# Altium PCB Choin1_0.PcbDoc (part 2 of 3)
Units mm, origin at the board's own origin, x right, y up, seen from the top; angles counter-clockwise.
Board outline 61 x 61 mm, 6 copper layers (Top Layer, MidLayer1, MidLayer 2, Mid-Layer 3, Mid-Layer 4, Bottom Layer), stack 1.533 mm thick; 195 components, 482 nets, 1610 pads, 432 vias.
Unrouted connection lines stored in the file: 170.
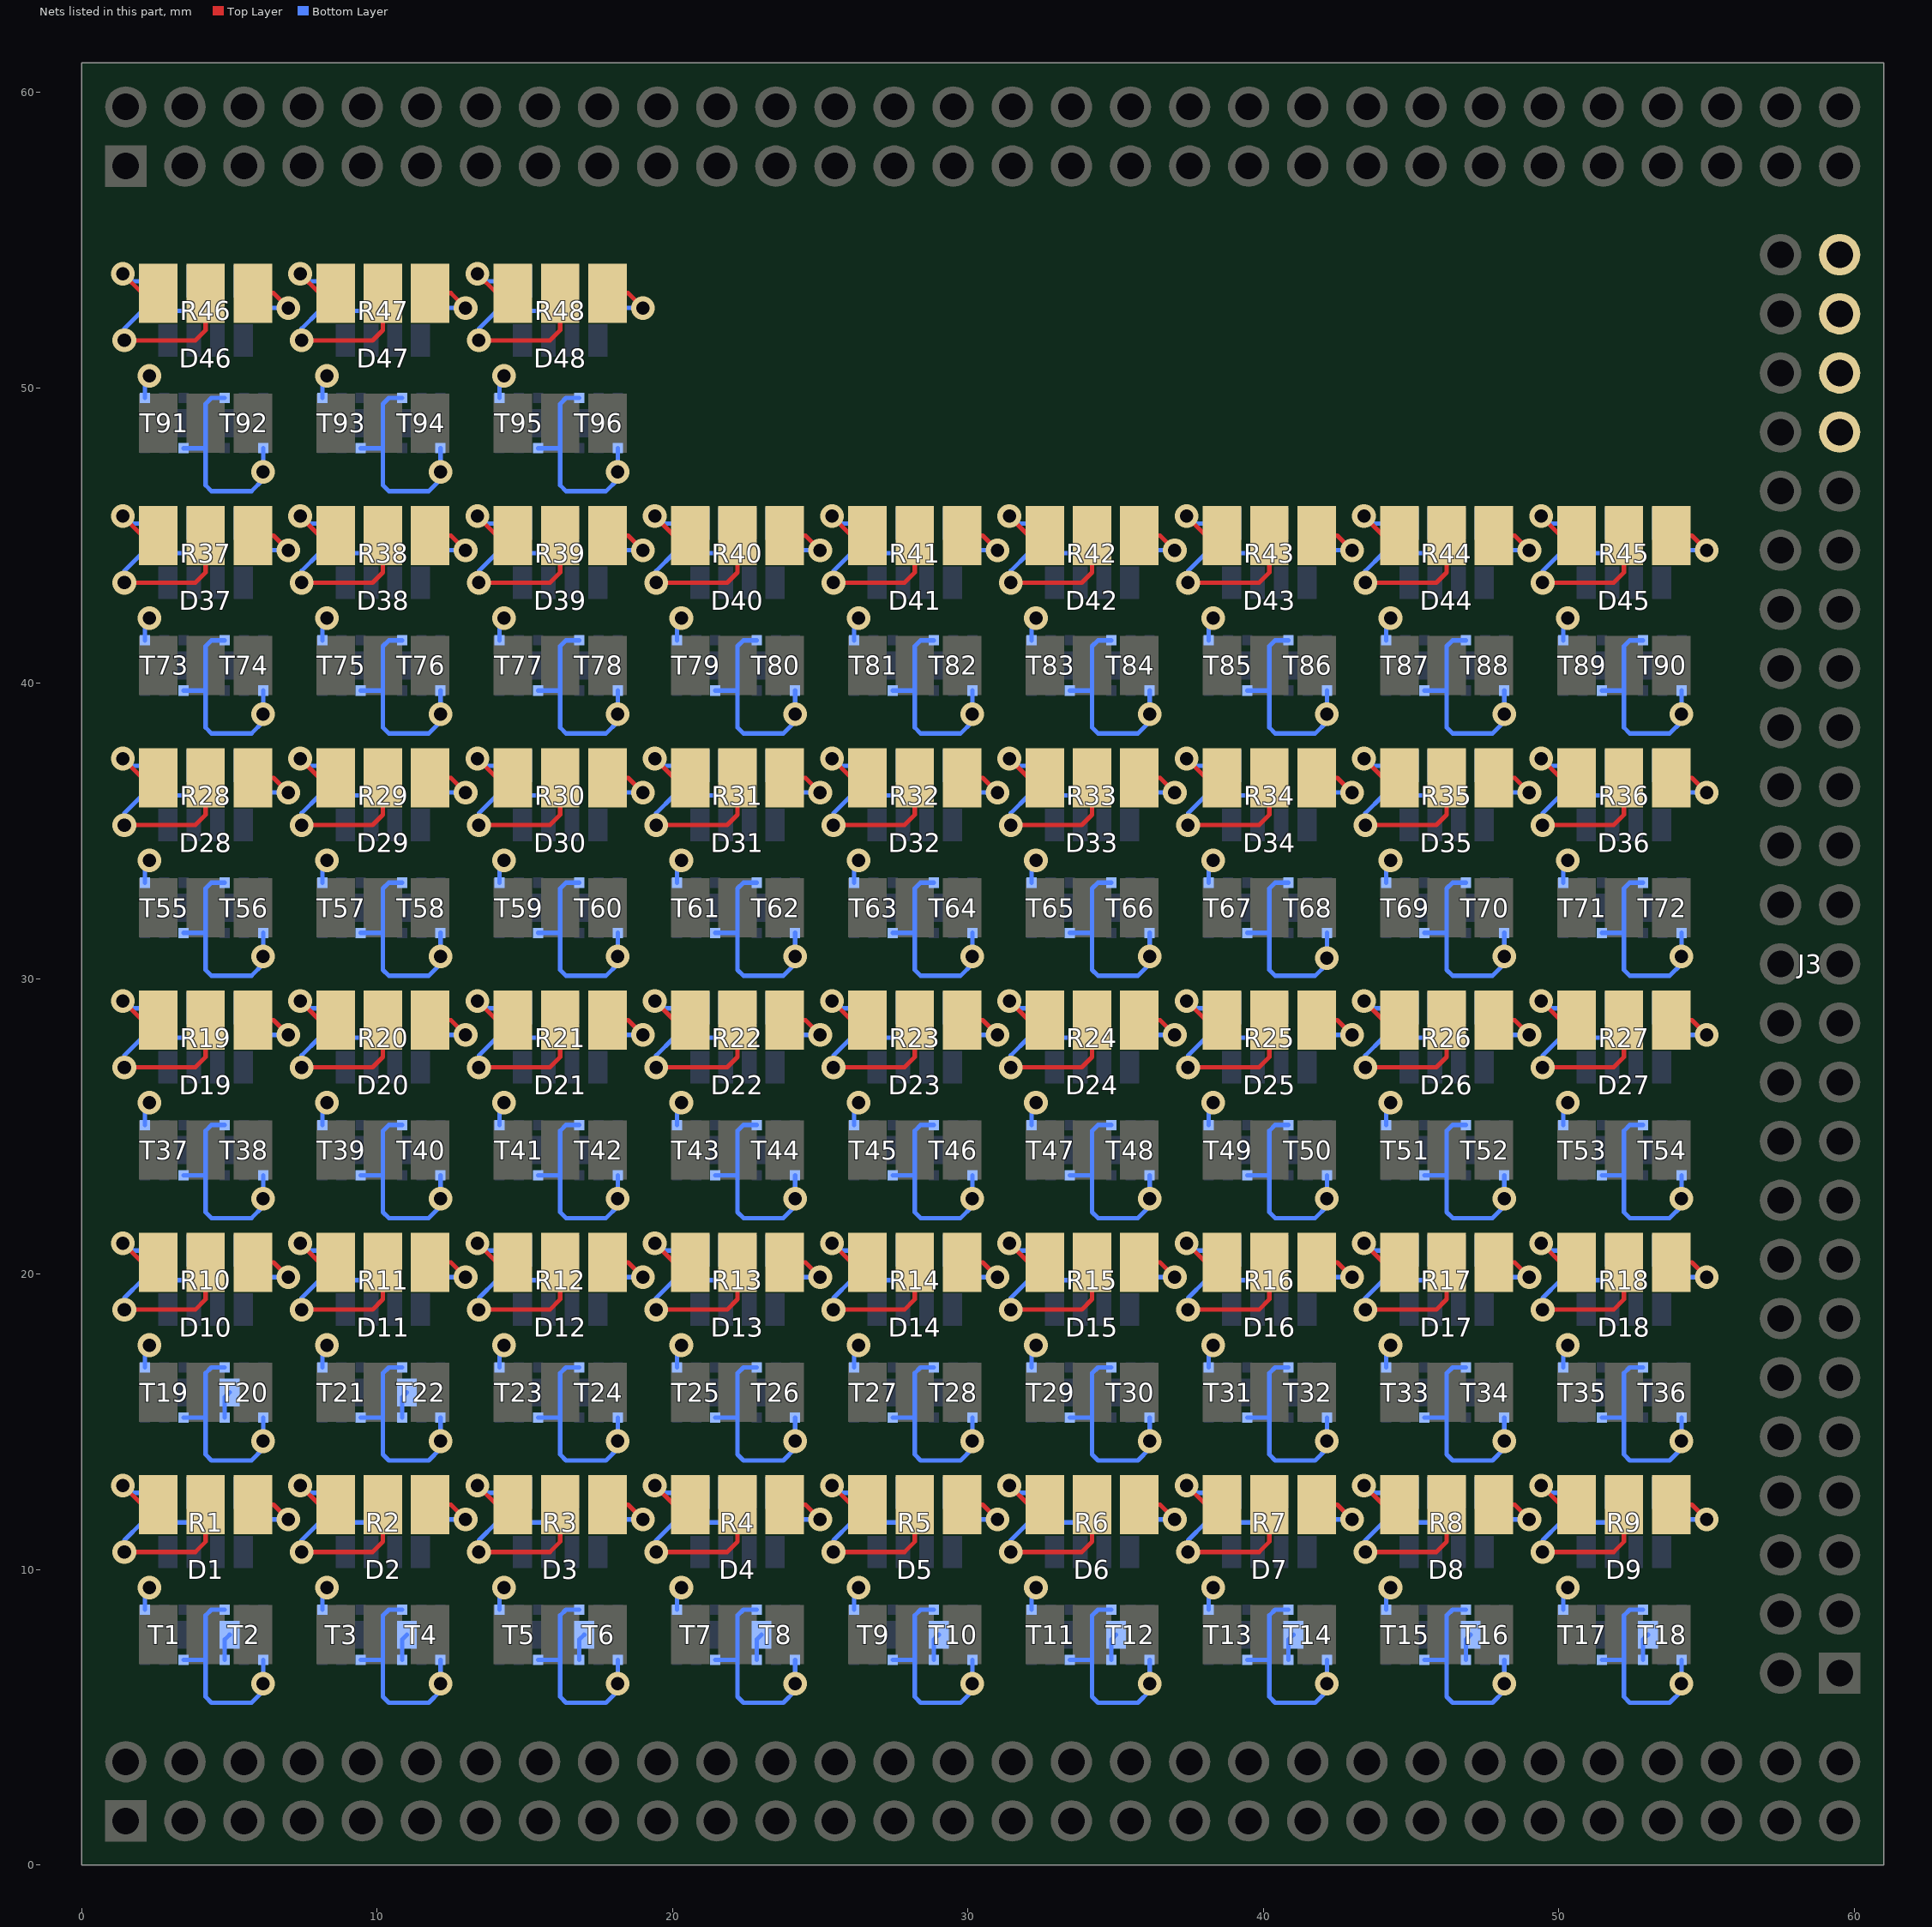
[diagram p2: the nets of this part, all layers, seen from the top]

## Via types
v1: diameter 0.8, hole 0.45, Top Layer to Bottom Layer, 432 vias

## Nets (pads, with @x,y where several pads share a name; then routed paths per layer and width w, separated by ;. In a path a pad name is that pad's centre, name@x,y a point inside that pad or via, vN(x,y) a via of type N, cw(c..) or ccw(c..) an arc to the next point about the centre after c; other vN are vias at no path point) (continued)
GND: J3.43 J3.45 J3.47 J3.49 T1.1 T1.4 T2.1 T2.4 T3.1 T3.4 T4.1 T4.4 T5.1 T5.4 T6.1 T6.4 T7.1 T7.4 T8.1 T8.4 T9.1 T9.4 T10.1 T10.4 T11.1 T11.4 T12.1 T12.4 T13.1 T13.4 T14.1 T14.4 T15.1 T15.4 T16.1 T16.4 T17.1 T17.4 T18.1 T18.4 T19.1 T19.4 T20.1 T20.4 T21.1 T21.4 T22.1 T22.4 T23.1 T23.4 T24.1 T24.4 T25.1 T25.4 T26.1 T26.4 T27.1 T27.4 T28.1 T28.4 T29.1 T29.4 T30.1 T30.4 T31.1 T31.4 T32.1 T32.4 T33.1 T33.4 T34.1 T34.4 T35.1 T35.4 T36.1 T36.4 T37.1 T37.4 T38.1 T38.4 T39.1 T39.4 T40.1 T40.4 T41.1 T41.4 T42.1 T42.4 T43.1 T43.4 T44.1 T44.4 T45.1 T45.4 T46.1 T46.4 T47.1 T47.4 T48.1 T48.4 T49.1 T49.4 T50.1 T50.4 T51.1 T51.4 T52.1 T52.4 T53.1 T53.4 T54.1 T54.4 T55.1 T55.4 T56.1 T56.4 T57.1 T57.4 T58.1 T58.4 T59.1 T59.4 T60.1 T60.4 T61.1 T61.4 T62.1 T62.4 T63.1 T63.4 T64.1 T64.4 T65.1 T65.4 T66.1 T66.4 T67.1 T67.4 T68.1 T68.4 T69.1 T69.4 T70.1 T70.4 T71.1 T71.4 T72.1 T72.4 T73.1 T73.4 T74.1 T74.4 T75.1 T75.4 T76.1 T76.4 T77.1 T77.4 T78.1 T78.4 T79.1 T79.4 T80.1 T80.4 T81.1 T81.4 T82.1 T82.4 T83.1 T83.4 T84.1 T84.4 T85.1 T85.4 T86.1 T86.4 T87.1 T87.4 T88.1 T88.4 T89.1 T89.4 T90.1 T90.4 T91.1 T91.4 T92.1 T92.4 T93.1 T93.4 T94.1 T94.4 T95.1 T95.4 T96.1 T96.4 | length 398.1
  Bottom Layer w0.15: T1.4@2.15,8.65 2.15,9.25 v1(2.3,9.4) ; T19.4@2.15,16.85 2.15,17.45 v1(2.3,17.6) ; T37.4@2.15,25.05 2.15,25.65 v1(2.3,25.8) ; T55.4@2.15,33.25 2.15,33.85 v1(2.3,34) ; T73.4@2.15,41.45 2.15,42.05 v1(2.3,42.2) ; T91.4@2.15,49.65 2.15,50.25 v1(2.3,50.4) ; T1.1@3.45,6.95 4.2,6.95 ; T19.1@3.45,15.15 4.2,15.15 ; T37.1@3.45,23.35 4.2,23.35 ; T55.1@3.45,31.55 4.2,31.55 ; T73.1@3.45,39.75 4.2,39.75 ; T91.1@3.45,47.95 4.2,47.95 ; T2.4@4.85,8.65 4.4,8.65 4.2,8.45 4.2,6.95 ; T20.4@4.85,16.85 4.4,16.85 4.2,16.65 4.2,15.15 ; T38.4@4.85,25.05 4.4,25.05 4.2,24.85 4.2,23.35 ; T56.4@4.85,33.25 4.4,33.25 4.2,33.05 4.2,31.55 ; T74.4@4.85,41.45 4.4,41.45 4.2,41.25 4.2,39.75 ; T92.4@4.85,49.65 4.4,49.65 4.2,49.45 4.2,47.95 ; T2.1@6.15,6.95 6.15,5.9 5.75,5.5 4.4,5.5 4.2,5.7 4.2,6.95 ; T20.1@6.15,15.15 6.15,14.1 5.75,13.7 4.4,13.7 4.2,13.9 4.2,15.15 ; T38.1@6.15,23.35 6.15,22.3 5.75,21.9 4.4,21.9 4.2,22.1 4.2,23.35 ; T56.1@6.15,31.55 6.15,30.5 5.75,30.1 4.4,30.1 4.2,30.3 4.2,31.55 ; T74.1@6.15,39.75 6.15,38.7 5.75,38.3 4.4,38.3 4.2,38.5 4.2,39.75 ; T92.1@6.15,47.95 6.15,46.9 5.75,46.5 4.4,46.5 4.2,46.7 4.2,47.95 ; T3.4@8.15,8.65 8.15,9.25 v1(8.3,9.4) ; T21.4@8.15,16.85 8.15,17.45 v1(8.3,17.6) ; T39.4@8.15,25.05 8.15,25.65 v1(8.3,25.8) ; T57.4@8.15,33.25 8.15,33.85 v1(8.3,34) ; T75.4@8.15,41.45 8.15,42.05 v1(8.3,42.2) ; T93.4@8.15,49.65 8.15,50.25 v1(8.3,50.4) ; T3.1@9.45,6.95 10.2,6.95 ; T21.1@9.45,15.15 10.2,15.15 ; T39.1@9.45,23.35 10.2,23.35 ; T57.1@9.45,31.55 10.2,31.55 ; T75.1@9.45,39.75 10.2,39.75 ; T93.1@9.45,47.95 10.2,47.95 ; T4.4@10.85,8.65 10.4,8.65 10.2,8.45 10.2,6.95 ; T22.4@10.85,16.85 10.4,16.85 10.2,16.65 10.2,15.15 ; T40.4@10.85,25.05 10.4,25.05 10.2,24.85 10.2,23.35 ; T58.4@10.85,33.25 10.4,33.25 10.2,33.05 10.2,31.55 ; T76.4@10.85,41.45 10.4,41.45 10.2,41.25 10.2,39.75 ; T94.4@10.85,49.65 10.4,49.65 10.2,49.45 10.2,47.95 ; T4.1@12.15,6.95 12.15,5.9 11.75,5.5 10.4,5.5 10.2,5.7 10.2,6.95 ; T22.1@12.15,15.15 12.15,14.1 11.75,13.7 10.4,13.7 10.2,13.9 10.2,15.15 ; T40.1@12.15,23.35 12.15,22.3 11.75,21.9 10.4,21.9 10.2,22.1 10.2,23.35 ; T58.1@12.15,31.55 12.15,30.5 11.75,30.1 10.4,30.1 10.2,30.3 10.2,31.55 ; T76.1@12.15,39.75 12.15,38.7 11.75,38.3 10.4,38.3 10.2,38.5 10.2,39.75 ; T94.1@12.15,47.95 12.15,46.9 11.75,46.5 10.4,46.5 10.2,46.7 10.2,47.95 ; T5.4@14.15,8.65 14.15,9.25 v1(14.3,9.4) ; T23.4@14.15,16.85 14.15,17.45 v1(14.3,17.6) ; T41.4@14.15,25.05 14.15,25.65 v1(14.3,25.8) ; T59.4@14.15,33.25 14.15,33.85 v1(14.3,34) ; T77.4@14.15,41.45 14.15,42.05 v1(14.3,42.2) ; T95.4@14.15,49.65 14.15,50.25 v1(14.3,50.4) ; T5.1@15.45,6.95 16.2,6.95 ; T23.1@15.45,15.15 16.2,15.15 ; T41.1@15.45,23.35 16.2,23.35 ; T59.1@15.45,31.55 16.2,31.55 ; T77.1@15.45,39.75 16.2,39.75 ; T95.1@15.45,47.95 16.2,47.95 ; T6.4@16.85,8.65 16.4,8.65 16.2,8.45 16.2,6.95 ; T24.4@16.85,16.85 16.4,16.85 16.2,16.65 16.2,15.15 ; T42.4@16.85,25.05 16.4,25.05 16.2,24.85 16.2,23.35 ; T60.4@16.85,33.25 16.4,33.25 16.2,33.05 16.2,31.55 ; T78.4@16.85,41.45 16.4,41.45 16.2,41.25 16.2,39.75 ; T96.4@16.85,49.65 16.4,49.65 16.2,49.45 16.2,47.95 ; T6.1@18.15,6.95 18.15,5.9 17.75,5.5 16.4,5.5 16.2,5.7 16.2,6.95 ; T24.1@18.15,15.15 18.15,14.1 17.75,13.7 16.4,13.7 16.2,13.9 16.2,15.15 ; T42.1@18.15,23.35 18.15,22.3 17.75,21.9 16.4,21.9 16.2,22.1 16.2,23.35 ; T60.1@18.15,31.55 18.15,30.5 17.75,30.1 16.4,30.1 16.2,30.3 16.2,31.55 ; T78.1@18.15,39.75 18.15,38.7 17.75,38.3 16.4,38.3 16.2,38.5 16.2,39.75 ; T96.1@18.15,47.95 18.15,46.9 17.75,46.5 16.4,46.5 16.2,46.7 16.2,47.95 ; T7.4@20.15,8.65 20.15,9.25 v1(20.3,9.4) ; T25.4@20.15,16.85 20.15,17.45 v1(20.3,17.6) ; T43.4@20.15,25.05 20.15,25.65 v1(20.3,25.8) ; T61.4@20.15,33.25 20.15,33.85 v1(20.3,34) ; T79.4@20.15,41.45 20.15,42.05 v1(20.3,42.2) ; T7.1@21.45,6.95 22.2,6.95 ; T25.1@21.45,15.15 22.2,15.15 ; T43.1@21.45,23.35 22.2,23.35 ; T61.1@21.45,31.55 22.2,31.55 ; T79.1@21.45,39.75 22.2,39.75 ; T8.4@22.85,8.65 22.4,8.65 22.2,8.45 22.2,6.95 ; T26.4@22.85,16.85 22.4,16.85 22.2,16.65 22.2,15.15 ; T44.4@22.85,25.05 22.4,25.05 22.2,24.85 22.2,23.35 ; T62.4@22.85,33.25 22.4,33.25 22.2,33.05 22.2,31.55 ; T80.4@22.85,41.45 22.4,41.45 22.2,41.25 22.2,39.75 ; T8.1@24.15,6.95 24.15,5.9 23.75,5.5 22.4,5.5 22.2,5.7 22.2,6.95 ; T26.1@24.15,15.15 24.15,14.1 23.75,13.7 22.4,13.7 22.2,13.9 22.2,15.15 ; T44.1@24.15,23.35 24.15,22.3 23.75,21.9 22.4,21.9 22.2,22.1 22.2,23.35 ; T62.1@24.15,31.55 24.15,30.5 23.75,30.1 22.4,30.1 22.2,30.3 22.2,31.55 ; T80.1@24.15,39.75 24.15,38.7 23.75,38.3 22.4,38.3 22.2,38.5 22.2,39.75 ; T9.4@26.15,8.65 26.15,9.25 v1(26.3,9.4) ; T27.4@26.15,16.85 26.15,17.45 v1(26.3,17.6) ; T45.4@26.15,25.05 26.15,25.65 v1(26.3,25.8) ; T63.4@26.15,33.25 26.15,33.85 v1(26.3,34) ; T81.4@26.15,41.45 26.15,42.05 v1(26.3,42.2) ; T9.1@27.45,6.95 28.2,6.95 ; T27.1@27.45,15.15 28.2,15.15 ; T45.1@27.45,23.35 28.2,23.35 ; T63.1@27.45,31.55 28.2,31.55 ; T81.1@27.45,39.75 28.2,39.75 ; T10.4@28.85,8.65 28.4,8.65 28.2,8.45 28.2,6.95 ; T28.4@28.85,16.85 28.4,16.85 28.2,16.65 28.2,15.15 ; T46.4@28.85,25.05 28.4,25.05 28.2,24.85 28.2,23.35 ; T64.4@28.85,33.25 28.4,33.25 28.2,33.05 28.2,31.55 ; T82.4@28.85,41.45 28.4,41.45 28.2,41.25 28.2,39.75 ; T10.1@30.15,6.95 30.15,5.9 29.75,5.5 28.4,5.5 28.2,5.7 28.2,6.95 ; T28.1@30.15,15.15 30.15,14.1 29.75,13.7 28.4,13.7 28.2,13.9 28.2,15.15 ; T46.1@30.15,23.35 30.15,22.3 29.75,21.9 28.4,21.9 28.2,22.1 28.2,23.35 ; T64.1@30.15,31.55 30.15,30.5 29.75,30.1 28.4,30.1 28.2,30.3 28.2,31.55 ; T82.1@30.15,39.75 30.15,38.7 29.75,38.3 28.4,38.3 28.2,38.5 28.2,39.75 ; T11.4@32.15,8.65 32.15,9.25 v1(32.3,9.4) ; T29.4@32.15,16.85 32.15,17.45 v1(32.3,17.6) ; T47.4@32.15,25.05 32.15,25.65 v1(32.3,25.8) ; T65.4@32.15,33.25 32.15,33.85 v1(32.3,34) ; T83.4@32.15,41.45 32.15,42.05 v1(32.3,42.2) ; T11.1@33.45,6.95 34.2,6.95 ; T29.1@33.45,15.15 34.2,15.15 ; T47.1@33.45,23.35 34.2,23.35 ; T65.1@33.45,31.55 34.2,31.55 ; T83.1@33.45,39.75 34.2,39.75 ; T12.4@34.85,8.65 34.4,8.65 34.2,8.45 34.2,6.95 ; T30.4@34.85,16.85 34.4,16.85 34.2,16.65 34.2,15.15 ; T48.4@34.85,25.05 34.4,25.05 34.2,24.85 34.2,23.35 ; T66.4@34.85,33.25 34.4,33.25 34.2,33.05 34.2,31.55 ; T84.4@34.85,41.45 34.4,41.45 34.2,41.25 34.2,39.75 ; T12.1@36.15,6.95 36.15,5.9 35.75,5.5 34.4,5.5 34.2,5.7 34.2,6.95 ; T30.1@36.15,15.15 36.15,14.1 35.75,13.7 34.4,13.7 34.2,13.9 34.2,15.15 ; T48.1@36.15,23.35 36.15,22.3 35.75,21.9 34.4,21.9 34.2,22.1 34.2,23.35 ; T66.1@36.15,31.55 36.15,30.5 35.75,30.1 34.4,30.1 34.2,30.3 34.2,31.55 ; T84.1@36.15,39.75 36.15,38.7 35.75,38.3 34.4,38.3 34.2,38.5 34.2,39.75 ; T13.4@38.15,8.65 38.15,9.25 v1(38.3,9.4) ; T31.4@38.15,16.85 38.15,17.45 v1(38.3,17.6) ; T49.4@38.15,25.05 38.15,25.65 v1(38.3,25.8) ; T67.4@38.15,33.25 38.15,33.85 v1(38.3,34) ; T85.4@38.15,41.45 38.15,42.05 v1(38.3,42.2) ; T13.1@39.45,6.95 40.2,6.95 ; T31.1@39.45,15.15 40.2,15.15 ; T49.1@39.45,23.35 40.2,23.35 ; T67.1@39.45,31.55 40.2,31.55 ; T85.1@39.45,39.75 40.2,39.75 ; T14.4@40.85,8.65 40.4,8.65 40.2,8.45 40.2,6.95 ; T32.4@40.85,16.85 40.4,16.85 40.2,16.65 40.2,15.15 ; T50.4@40.85,25.05 40.4,25.05 40.2,24.85 40.2,23.35 ; T68.4@40.85,33.25 40.4,33.25 40.2,33.05 40.2,31.55 ; T86.4@40.85,41.45 40.4,41.45 40.2,41.25 40.2,39.75 ; T14.1@42.15,6.95 42.15,5.9 41.75,5.5 40.4,5.5 40.2,5.7 40.2,6.95 ; T32.1@42.15,15.15 42.15,14.1 41.75,13.7 40.4,13.7 40.2,13.9 40.2,15.15 ; T50.1@42.15,23.35 42.15,22.3 41.75,21.9 40.4,21.9 40.2,22.1 40.2,23.35 ; T68.1@42.15,31.55 42.15,30.5 41.75,30.1 40.4,30.1 40.2,30.3 40.2,31.55 ; T86.1@42.15,39.75 42.15,38.7 41.75,38.3 40.4,38.3 40.2,38.5 40.2,39.75 ; T15.4@44.15,8.65 44.15,9.25 v1(44.3,9.4) ; T33.4@44.15,16.85 44.15,17.45 v1(44.3,17.6) ; T51.4@44.15,25.05 44.15,25.65 v1(44.3,25.8) ; T69.4@44.15,33.25 44.15,33.85 v1(44.3,34) ; T87.4@44.15,41.45 44.15,42.05 v1(44.3,42.2) ; T15.1@45.45,6.95 46.2,6.95 ; T33.1@45.45,15.15 46.2,15.15 ; T51.1@45.45,23.35 46.2,23.35 ; T69.1@45.45,31.55 46.2,31.55 ; T87.1@45.45,39.75 46.2,39.75 ; T16.4@46.85,8.65 46.4,8.65 46.2,8.45 46.2,6.95 ; T34.4@46.85,16.85 46.4,16.85 46.2,16.65 46.2,15.15 ; T52.4@46.85,25.05 46.4,25.05 46.2,24.85 46.2,23.35 ; T70.4@46.85,33.25 46.4,33.25 46.2,33.05 46.2,31.55 ; T88.4@46.85,41.45 46.4,41.45 46.2,41.25 46.2,39.75 ; T16.1@48.15,6.95 48.15,5.9 47.75,5.5 46.4,5.5 46.2,5.7 46.2,6.95 ; T34.1@48.15,15.15 48.15,14.1 47.75,13.7 46.4,13.7 46.2,13.9 46.2,15.15 ; T52.1@48.15,23.35 48.15,22.3 47.75,21.9 46.4,21.9 46.2,22.1 46.2,23.35 ; T70.1@48.15,31.55 48.15,30.5 47.75,30.1 46.4,30.1 46.2,30.3 46.2,31.55 ; T88.1@48.15,39.75 48.15,38.7 47.75,38.3 46.4,38.3 46.2,38.5 46.2,39.75 ; T17.4@50.15,8.65 50.15,9.25 v1(50.3,9.4) ; T35.4@50.15,16.85 50.15,17.45 v1(50.3,17.6) ; T53.4@50.15,25.05 50.15,25.65 v1(50.3,25.8) ; T71.4@50.15,33.25 50.15,33.85 v1(50.3,34) ; T89.4@50.15,41.45 50.15,42.05 v1(50.3,42.2) ; T17.1@51.45,6.95 52.2,6.95 ; T35.1@51.45,15.15 52.2,15.15 ; T53.1@51.45,23.35 52.2,23.35 ; T71.1@51.45,31.55 52.2,31.55 ; T89.1@51.45,39.75 52.2,39.75 ; T18.4@52.85,8.65 52.4,8.65 52.2,8.45 52.2,6.95 ; T36.4@52.85,16.85 52.4,16.85 52.2,16.65 52.2,15.15 ; T54.4@52.85,25.05 52.4,25.05 52.2,24.85 52.2,23.35 ; T72.4@52.85,33.25 52.4,33.25 52.2,33.05 52.2,31.55 ; T90.4@52.85,41.45 52.4,41.45 52.2,41.25 52.2,39.75 ; T18.1@54.15,6.95 54.15,5.9 53.75,5.5 52.4,5.5 52.2,5.7 52.2,6.95 ; T36.1@54.15,15.15 54.15,14.1 53.75,13.7 52.4,13.7 52.2,13.9 52.2,15.15 ; T54.1@54.15,23.35 54.15,22.3 53.75,21.9 52.4,21.9 52.2,22.1 52.2,23.35 ; T72.1@54.15,31.55 54.15,30.5 53.75,30.1 52.4,30.1 52.2,30.3 52.2,31.55 ; T90.1@54.15,39.75 54.15,38.7 53.75,38.3 52.4,38.3 52.2,38.5 52.2,39.75
  other v1: 6.15,6.15 12.15,6.15 18.15,6.15 24.15,6.15 30.15,6.15 36.15,6.15 42.15,6.15 48.15,6.15 54.15,6.15 6.15,14.35 12.15,14.35 18.15,14.35 24.15,14.35 30.15,14.35 36.15,14.35 42.15,14.35 48.15,14.35 54.15,14.35 6.15,22.55 12.15,22.55 18.15,22.55 24.15,22.55 30.15,22.55 36.15,22.55 42.15,22.55 48.15,22.55 54.15,22.55 42.15,30.7 6.15,30.75 12.15,30.75 18.15,30.75 24.15,30.75 30.15,30.75 36.15,30.75 48.15,30.75 54.15,30.75 6.15,38.95 12.15,38.95 18.15,38.95 24.15,38.95 30.15,38.95 36.15,38.95 42.15,38.95 48.15,38.95 54.15,38.95 6.15,47.15 12.15,47.15 18.15,47.15
LEDB0: D1.4 R1.5 | length 3.1
  Top Layer w0.15: v1(1.4,12.85) 2.05,12.2 D1.4@2.6,12.2
  Bottom Layer w0.15: v1(1.4,12.85) 1.65,12.6 R1.5@2.925,12.6
LEDB1: D2.4 R2.5 | length 3.1
  Top Layer w0.15: v1(7.4,12.85) 8.05,12.2 D2.4@8.6,12.2
  Bottom Layer w0.15: v1(7.4,12.85) 7.65,12.6 R2.5@8.925,12.6
LEDB2: D3.4 R3.5 | length 3.1
  Top Layer w0.15: v1(13.4,12.85) 14.05,12.2 D3.4@14.6,12.2
  Bottom Layer w0.15: v1(13.4,12.85) 13.65,12.6 R3.5@14.925,12.6
LEDB3: D4.4 R4.5 | length 3.1
  Top Layer w0.15: v1(19.4,12.85) 20.05,12.2 D4.4@20.6,12.2
  Bottom Layer w0.15: v1(19.4,12.85) 19.65,12.6 R4.5@20.925,12.6
LEDB4: D5.4 R5.5 | length 3.1
  Top Layer w0.15: v1(25.4,12.85) 26.05,12.2 D5.4@26.6,12.2
  Bottom Layer w0.15: v1(25.4,12.85) 25.65,12.6 R5.5@26.925,12.6
LEDB5: D6.4 R6.5 | length 3.1
  Top Layer w0.15: v1(31.4,12.85) 32.05,12.2 D6.4@32.6,12.2
  Bottom Layer w0.15: v1(31.4,12.85) 31.65,12.6 R6.5@32.925,12.6
LEDB6: D7.4 R7.5 | length 3.1
  Top Layer w0.15: v1(37.4,12.85) 38.05,12.2 D7.4@38.6,12.2
  Bottom Layer w0.15: v1(37.4,12.85) 37.65,12.6 R7.5@38.925,12.6
LEDB7: D8.4 R8.5 | length 3.1
  Top Layer w0.15: v1(43.4,12.85) 44.05,12.2 D8.4@44.6,12.2
  Bottom Layer w0.15: v1(43.4,12.85) 43.65,12.6 R8.5@44.925,12.6
LEDB8: D9.4 R9.5 | length 3.1
  Top Layer w0.15: v1(49.4,12.85) 50.05,12.2 D9.4@50.6,12.2
  Bottom Layer w0.15: v1(49.4,12.85) 49.65,12.6 R9.5@50.925,12.6
LEDB9: D10.4 R10.5 | length 3.1
  Top Layer w0.15: v1(1.4,21.05) 2.05,20.4 D10.4@2.6,20.4
  Bottom Layer w0.15: v1(1.4,21.05) 1.65,20.8 R10.5@2.925,20.8
LEDB10: D11.4 R11.5 | length 3.1
  Top Layer w0.15: v1(7.4,21.05) 8.05,20.4 D11.4@8.6,20.4
  Bottom Layer w0.15: v1(7.4,21.05) 7.65,20.8 R11.5@8.925,20.8
LEDB11: D12.4 R12.5 | length 3.1
  Top Layer w0.15: v1(13.4,21.05) 14.05,20.4 D12.4@14.6,20.4
  Bottom Layer w0.15: v1(13.4,21.05) 13.65,20.8 R12.5@14.925,20.8
LEDB12: D13.4 R13.5 | length 3.1
  Top Layer w0.15: v1(19.4,21.05) 20.05,20.4 D13.4@20.6,20.4
  Bottom Layer w0.15: v1(19.4,21.05) 19.65,20.8 R13.5@20.925,20.8
LEDB13: D14.4 R14.5 | length 3.1
  Top Layer w0.15: v1(25.4,21.05) 26.05,20.4 D14.4@26.6,20.4
  Bottom Layer w0.15: v1(25.4,21.05) 25.65,20.8 R14.5@26.925,20.8
LEDB14: D15.4 R15.5 | length 3.1
  Top Layer w0.15: v1(31.4,21.05) 32.05,20.4 D15.4@32.6,20.4
  Bottom Layer w0.15: v1(31.4,21.05) 31.65,20.8 R15.5@32.925,20.8
LEDB15: D16.4 R16.5 | length 3.1
  Top Layer w0.15: v1(37.4,21.05) 38.05,20.4 D16.4@38.6,20.4
  Bottom Layer w0.15: v1(37.4,21.05) 37.65,20.8 R16.5@38.925,20.8
LEDB16: D17.4 R17.5 | length 3.1
  Top Layer w0.15: v1(43.4,21.05) 44.05,20.4 D17.4@44.6,20.4
  Bottom Layer w0.15: v1(43.4,21.05) 43.65,20.8 R17.5@44.925,20.8
LEDB17: D18.4 R18.5 | length 3.1
  Top Layer w0.15: v1(49.4,21.05) 50.05,20.4 D18.4@50.6,20.4
  Bottom Layer w0.15: v1(49.4,21.05) 49.65,20.8 R18.5@50.925,20.8
LEDB18: D19.4 R19.5 | length 3.1
  Top Layer w0.15: v1(1.4,29.25) 2.05,28.6 D19.4@2.6,28.6
  Bottom Layer w0.15: v1(1.4,29.25) 1.65,29 R19.5@2.925,29
LEDB19: D20.4 R20.5 | length 3.1
  Top Layer w0.15: v1(7.4,29.25) 8.05,28.6 D20.4@8.6,28.6
  Bottom Layer w0.15: v1(7.4,29.25) 7.65,29 R20.5@8.925,29
LEDB20: D21.4 R21.5 | length 3.1
  Top Layer w0.15: v1(13.4,29.25) 14.05,28.6 D21.4@14.6,28.6
  Bottom Layer w0.15: v1(13.4,29.25) 13.65,29 R21.5@14.925,29
LEDB21: D22.4 R22.5 | length 3.1
  Top Layer w0.15: v1(19.4,29.25) 20.05,28.6 D22.4@20.6,28.6
  Bottom Layer w0.15: v1(19.4,29.25) 19.65,29 R22.5@20.925,29
LEDB22: D23.4 R23.5 | length 3.1
  Top Layer w0.15: v1(25.4,29.25) 26.05,28.6 D23.4@26.6,28.6
  Bottom Layer w0.15: v1(25.4,29.25) 25.65,29 R23.5@26.925,29
LEDB23: D24.4 R24.5 | length 3.1
  Top Layer w0.15: v1(31.4,29.25) 32.05,28.6 D24.4@32.6,28.6
  Bottom Layer w0.15: v1(31.4,29.25) 31.65,29 R24.5@32.925,29
LEDB24: D25.4 R25.5 | length 3.1
  Top Layer w0.15: v1(37.4,29.25) 38.05,28.6 D25.4@38.6,28.6
  Bottom Layer w0.15: v1(37.4,29.25) 37.65,29 R25.5@38.925,29
LEDB25: D26.4 R26.5 | length 3.1
  Top Layer w0.15: v1(43.4,29.25) 44.05,28.6 D26.4@44.6,28.6
  Bottom Layer w0.15: v1(43.4,29.25) 43.65,29 R26.5@44.925,29
LEDB26: D27.4 R27.5 | length 3.1
  Top Layer w0.15: v1(49.4,29.25) 50.05,28.6 D27.4@50.6,28.6
  Bottom Layer w0.15: v1(49.4,29.25) 49.65,29 R27.5@50.925,29
LEDB27: D28.4 R28.5 | length 3.1
  Top Layer w0.15: v1(1.4,37.45) 2.05,36.8 D28.4@2.6,36.8
  Bottom Layer w0.15: v1(1.4,37.45) 1.65,37.2 R28.5@2.925,37.2
LEDB28: D29.4 R29.5 | length 3.1
  Top Layer w0.15: v1(7.4,37.45) 8.05,36.8 D29.4@8.6,36.8
  Bottom Layer w0.15: v1(7.4,37.45) 7.65,37.2 R29.5@8.925,37.2
LEDB29: D30.4 R30.5 | length 3.1
  Top Layer w0.15: v1(13.4,37.45) 14.05,36.8 D30.4@14.6,36.8
  Bottom Layer w0.15: v1(13.4,37.45) 13.65,37.2 R30.5@14.925,37.2
LEDB30: D31.4 R31.5 | length 3.1
  Top Layer w0.15: v1(19.4,37.45) 20.05,36.8 D31.4@20.6,36.8
  Bottom Layer w0.15: v1(19.4,37.45) 19.65,37.2 R31.5@20.925,37.2
LEDB31: D32.4 R32.5 | length 3.1
  Top Layer w0.15: v1(25.4,37.45) 26.05,36.8 D32.4@26.6,36.8
  Bottom Layer w0.15: v1(25.4,37.45) 25.65,37.2 R32.5@26.925,37.2
LEDB32: D33.4 R33.5 | length 3.1
  Top Layer w0.15: v1(31.4,37.45) 32.05,36.8 D33.4@32.6,36.8
  Bottom Layer w0.15: v1(31.4,37.45) 31.65,37.2 R33.5@32.925,37.2
LEDB33: D34.4 R34.5 | length 3.1
  Top Layer w0.15: v1(37.4,37.45) 38.05,36.8 D34.4@38.6,36.8
  Bottom Layer w0.15: v1(37.4,37.45) 37.65,37.2 R34.5@38.925,37.2
LEDB34: D35.4 R35.5 | length 3.1
  Top Layer w0.15: v1(43.4,37.45) 44.05,36.8 D35.4@44.6,36.8
  Bottom Layer w0.15: v1(43.4,37.45) 43.65,37.2 R35.5@44.925,37.2
LEDB35: D36.4 R36.5 | length 3.1
  Top Layer w0.15: v1(49.4,37.45) 50.05,36.8 D36.4@50.6,36.8
  Bottom Layer w0.15: v1(49.4,37.45) 49.65,37.2 R36.5@50.925,37.2
LEDB36: D37.4 R37.5 | length 3.1
  Top Layer w0.15: v1(1.4,45.65) 2.05,45 D37.4@2.6,45
  Bottom Layer w0.15: v1(1.4,45.65) 1.65,45.4 R37.5@2.925,45.4
LEDB37: D38.4 R38.5 | length 3.1
  Top Layer w0.15: v1(7.4,45.65) 8.05,45 D38.4@8.6,45
  Bottom Layer w0.15: v1(7.4,45.65) 7.65,45.4 R38.5@8.925,45.4
LEDB38: D39.4 R39.5 | length 3.1
  Top Layer w0.15: v1(13.4,45.65) 14.05,45 D39.4@14.6,45
  Bottom Layer w0.15: v1(13.4,45.65) 13.65,45.4 R39.5@14.925,45.4
LEDB39: D40.4 R40.5 | length 3.1
  Top Layer w0.15: v1(19.4,45.65) 20.05,45 D40.4@20.6,45
  Bottom Layer w0.15: v1(19.4,45.65) 19.65,45.4 R40.5@20.925,45.4
LEDB40: D41.4 R41.5 | length 3.1
  Top Layer w0.15: v1(25.4,45.65) 26.05,45 D41.4@26.6,45
  Bottom Layer w0.15: v1(25.4,45.65) 25.65,45.4 R41.5@26.925,45.4
LEDB41: D42.4 R42.5 | length 3.1
  Top Layer w0.15: v1(31.4,45.65) 32.05,45 D42.4@32.6,45
  Bottom Layer w0.15: v1(31.4,45.65) 31.65,45.4 R42.5@32.925,45.4
LEDB42: D43.4 R43.5 | length 3.1
  Top Layer w0.15: v1(37.4,45.65) 38.05,45 D43.4@38.6,45
  Bottom Layer w0.15: v1(37.4,45.65) 37.65,45.4 R43.5@38.925,45.4
LEDB43: D44.4 R44.5 | length 3.1
  Top Layer w0.15: v1(43.4,45.65) 44.05,45 D44.4@44.6,45
  Bottom Layer w0.15: v1(43.4,45.65) 43.65,45.4 R44.5@44.925,45.4
LEDB44: D45.4 R45.5 | length 3.1
  Top Layer w0.15: v1(49.4,45.65) 50.05,45 D45.4@50.6,45
  Bottom Layer w0.15: v1(49.4,45.65) 49.65,45.4 R45.5@50.925,45.4
LEDB45: D46.4 R46.5 | length 3.1
  Top Layer w0.15: v1(1.4,53.85) 2.05,53.2 D46.4@2.6,53.2
  Bottom Layer w0.15: v1(1.4,53.85) 1.65,53.6 R46.5@2.925,53.6
LEDB46: D47.4 R47.5 | length 3.1
  Top Layer w0.15: v1(7.4,53.85) 8.05,53.2 D47.4@8.6,53.2
  Bottom Layer w0.15: v1(7.4,53.85) 7.65,53.6 R47.5@8.925,53.6
LEDB47: D48.4 R48.5 | length 3.1
  Top Layer w0.15: v1(13.4,53.85) 14.05,53.2 D48.4@14.6,53.2
  Bottom Layer w0.15: v1(13.4,53.85) 13.65,53.6 R48.5@14.925,53.6
LEDG0: D1.6 R1.8 | length 3.3
  Top Layer w0.15: D1.6@5.8,12.2 6.5,12.2 v1(7,11.7)
  Bottom Layer w0.15: R1.8@5.475,12.6 6.375,11.7 v1(7,11.7)
LEDG1: D2.6 R2.8 | length 3.3
  Top Layer w0.15: D2.6@11.8,12.2 12.5,12.2 v1(13,11.7)
  Bottom Layer w0.15: R2.8@11.475,12.6 12.375,11.7 v1(13,11.7)
LEDG2: D3.6 R3.8 | length 3.3
  Top Layer w0.15: D3.6@17.8,12.2 18.5,12.2 v1(19,11.7)
  Bottom Layer w0.15: R3.8@17.475,12.6 18.375,11.7 v1(19,11.7)
LEDG3: D4.6 R4.8 | length 3.3
  Top Layer w0.15: D4.6@23.8,12.2 24.5,12.2 v1(25,11.7)
  Bottom Layer w0.15: R4.8@23.475,12.6 24.375,11.7 v1(25,11.7)
LEDG4: D5.6 R5.8 | length 3.3
  Top Layer w0.15: D5.6@29.8,12.2 30.5,12.2 v1(31,11.7)
  Bottom Layer w0.15: R5.8@29.475,12.6 30.375,11.7 v1(31,11.7)
LEDG5: D6.6 R6.8 | length 3.3
  Top Layer w0.15: D6.6@35.8,12.2 36.5,12.2 v1(37,11.7)
  Bottom Layer w0.15: R6.8@35.475,12.6 36.375,11.7 v1(37,11.7)
LEDG6: D7.6 R7.8 | length 3.3
  Top Layer w0.15: D7.6@41.8,12.2 42.5,12.2 v1(43,11.7)
  Bottom Layer w0.15: R7.8@41.475,12.6 42.375,11.7 v1(43,11.7)
LEDG7: D8.6 R8.8 | length 3.3
  Top Layer w0.15: D8.6@47.8,12.2 48.5,12.2 v1(49,11.7)
  Bottom Layer w0.15: R8.8@47.475,12.6 48.375,11.7 v1(49,11.7)
LEDG8: D9.6 R9.8 | length 3.3
  Top Layer w0.15: D9.6@53.8,12.2 54.5,12.2 v1(55,11.7)
  Bottom Layer w0.15: R9.8@53.475,12.6 54.375,11.7 v1(55,11.7)
LEDG9: D10.6 R10.8 | length 3.3
  Top Layer w0.15: D10.6@5.8,20.4 6.5,20.4 v1(7,19.9)
  Bottom Layer w0.15: R10.8@5.475,20.8 6.375,19.9 v1(7,19.9)
LEDG10: D11.6 R11.8 | length 3.3
  Top Layer w0.15: D11.6@11.8,20.4 12.5,20.4 v1(13,19.9)
  Bottom Layer w0.15: R11.8@11.475,20.8 12.375,19.9 v1(13,19.9)
LEDG11: D12.6 R12.8 | length 3.3
  Top Layer w0.15: D12.6@17.8,20.4 18.5,20.4 v1(19,19.9)
  Bottom Layer w0.15: R12.8@17.475,20.8 18.375,19.9 v1(19,19.9)
LEDG12: D13.6 R13.8 | length 3.3
  Top Layer w0.15: D13.6@23.8,20.4 24.5,20.4 v1(25,19.9)
  Bottom Layer w0.15: R13.8@23.475,20.8 24.375,19.9 v1(25,19.9)
LEDG13: D14.6 R14.8 | length 3.3
  Top Layer w0.15: D14.6@29.8,20.4 30.5,20.4 v1(31,19.9)
  Bottom Layer w0.15: R14.8@29.475,20.8 30.375,19.9 v1(31,19.9)
LEDG14: D15.6 R15.8 | length 3.3
  Top Layer w0.15: D15.6@35.8,20.4 36.5,20.4 v1(37,19.9)
  Bottom Layer w0.15: R15.8@35.475,20.8 36.375,19.9 v1(37,19.9)
LEDG15: D16.6 R16.8 | length 3.3
  Top Layer w0.15: D16.6@41.8,20.4 42.5,20.4 v1(43,19.9)
  Bottom Layer w0.15: R16.8@41.475,20.8 42.375,19.9 v1(43,19.9)
LEDG16: D17.6 R17.8 | length 3.3
  Top Layer w0.15: D17.6@47.8,20.4 48.5,20.4 v1(49,19.9)
  Bottom Layer w0.15: R17.8@47.475,20.8 48.375,19.9 v1(49,19.9)
LEDG17: D18.6 R18.8 | length 3.3
  Top Layer w0.15: D18.6@53.8,20.4 54.5,20.4 v1(55,19.9)
  Bottom Layer w0.15: R18.8@53.475,20.8 54.375,19.9 v1(55,19.9)
LEDG18: D19.6 R19.8 | length 3.3
  Top Layer w0.15: D19.6@5.8,28.6 6.5,28.6 v1(7,28.1)
  Bottom Layer w0.15: R19.8@5.475,29 6.375,28.1 v1(7,28.1)
LEDG19: D20.6 R20.8 | length 3.3
  Top Layer w0.15: D20.6@11.8,28.6 12.5,28.6 v1(13,28.1)
  Bottom Layer w0.15: R20.8@11.475,29 12.375,28.1 v1(13,28.1)
LEDG20: D21.6 R21.8 | length 3.3
  Top Layer w0.15: D21.6@17.8,28.6 18.5,28.6 v1(19,28.1)
  Bottom Layer w0.15: R21.8@17.475,29 18.375,28.1 v1(19,28.1)
LEDG21: D22.6 R22.8 | length 3.3
  Top Layer w0.15: D22.6@23.8,28.6 24.5,28.6 v1(25,28.1)
  Bottom Layer w0.15: R22.8@23.475,29 24.375,28.1 v1(25,28.1)
LEDG22: D23.6 R23.8 | length 3.3
  Top Layer w0.15: D23.6@29.8,28.6 30.5,28.6 v1(31,28.1)
  Bottom Layer w0.15: R23.8@29.475,29 30.375,28.1 v1(31,28.1)
LEDG23: D24.6 R24.8 | length 3.3
  Top Layer w0.15: D24.6@35.8,28.6 36.5,28.6 v1(37,28.1)
  Bottom Layer w0.15: R24.8@35.475,29 36.375,28.1 v1(37,28.1)
LEDG24: D25.6 R25.8 | length 3.3
  Top Layer w0.15: D25.6@41.8,28.6 42.5,28.6 v1(43,28.1)
  Bottom Layer w0.15: R25.8@41.475,29 42.375,28.1 v1(43,28.1)
LEDG25: D26.6 R26.8 | length 3.3
  Top Layer w0.15: D26.6@47.8,28.6 48.5,28.6 v1(49,28.1)
  Bottom Layer w0.15: R26.8@47.475,29 48.375,28.1 v1(49,28.1)
LEDG26: D27.6 R27.8 | length 3.3
  Top Layer w0.15: D27.6@53.8,28.6 54.5,28.6 v1(55,28.1)
  Bottom Layer w0.15: R27.8@53.475,29 54.375,28.1 v1(55,28.1)
LEDG27: D28.6 R28.8 | length 3.3
  Top Layer w0.15: D28.6@5.8,36.8 6.5,36.8 v1(7,36.3)
  Bottom Layer w0.15: R28.8@5.475,37.2 6.375,36.3 v1(7,36.3)
LEDG28: D29.6 R29.8 | length 3.3
  Top Layer w0.15: D29.6@11.8,36.8 12.5,36.8 v1(13,36.3)
  Bottom Layer w0.15: R29.8@11.475,37.2 12.375,36.3 v1(13,36.3)
LEDG29: D30.6 R30.8 | length 3.3
  Top Layer w0.15: D30.6@17.8,36.8 18.5,36.8 v1(19,36.3)
  Bottom Layer w0.15: R30.8@17.475,37.2 18.375,36.3 v1(19,36.3)
LEDG30: D31.6 R31.8 | length 3.3
  Top Layer w0.15: D31.6@23.8,36.8 24.5,36.8 v1(25,36.3)
  Bottom Layer w0.15: R31.8@23.475,37.2 24.375,36.3 v1(25,36.3)
LEDG31: D32.6 R32.8 | length 3.3
  Top Layer w0.15: D32.6@29.8,36.8 30.5,36.8 v1(31,36.3)
  Bottom Layer w0.15: R32.8@29.475,37.2 30.375,36.3 v1(31,36.3)
LEDG32: D33.6 R33.8 | length 3.3
  Top Layer w0.15: D33.6@35.8,36.8 36.5,36.8 v1(37,36.3)
  Bottom Layer w0.15: R33.8@35.475,37.2 36.375,36.3 v1(37,36.3)
LEDG33: D34.6 R34.8 | length 3.3
  Top Layer w0.15: D34.6@41.8,36.8 42.5,36.8 v1(43,36.3)
  Bottom Layer w0.15: R34.8@41.475,37.2 42.375,36.3 v1(43,36.3)
LEDG34: D35.6 R35.8 | length 3.3
  Top Layer w0.15: D35.6@47.8,36.8 48.5,36.8 v1(49,36.3)
  Bottom Layer w0.15: R35.8@47.475,37.2 48.375,36.3 v1(49,36.3)
LEDG35: D36.6 R36.8 | length 3.3
  Top Layer w0.15: D36.6@53.8,36.8 54.5,36.8 v1(55,36.3)
  Bottom Layer w0.15: R36.8@53.475,37.2 54.375,36.3 v1(55,36.3)
LEDG36: D37.6 R37.8 | length 3.3
  Top Layer w0.15: D37.6@5.8,45 6.5,45 v1(7,44.5)
  Bottom Layer w0.15: R37.8@5.475,45.4 6.375,44.5 v1(7,44.5)
LEDG37: D38.6 R38.8 | length 3.3
  Top Layer w0.15: D38.6@11.8,45 12.5,45 v1(13,44.5)
  Bottom Layer w0.15: R38.8@11.475,45.4 12.375,44.5 v1(13,44.5)
LEDG38: D39.6 R39.8 | length 3.3
  Top Layer w0.15: D39.6@17.8,45 18.5,45 v1(19,44.5)
  Bottom Layer w0.15: R39.8@17.475,45.4 18.375,44.5 v1(19,44.5)
LEDG39: D40.6 R40.8 | length 3.3
  Top Layer w0.15: D40.6@23.8,45 24.5,45 v1(25,44.5)
  Bottom Layer w0.15: R40.8@23.475,45.4 24.375,44.5 v1(25,44.5)
LEDG40: D41.6 R41.8 | length 3.3
  Top Layer w0.15: D41.6@29.8,45 30.5,45 v1(31,44.5)
  Bottom Layer w0.15: R41.8@29.475,45.4 30.375,44.5 v1(31,44.5)
LEDG41: D42.6 R42.8 | length 3.3
  Top Layer w0.15: D42.6@35.8,45 36.5,45 v1(37,44.5)
  Bottom Layer w0.15: R42.8@35.475,45.4 36.375,44.5 v1(37,44.5)
LEDG42: D43.6 R43.8 | length 3.3
  Top Layer w0.15: D43.6@41.8,45 42.5,45 v1(43,44.5)
  Bottom Layer w0.15: R43.8@41.475,45.4 42.375,44.5 v1(43,44.5)
LEDG43: D44.6 R44.8 | length 3.3
  Top Layer w0.15: D44.6@47.8,45 48.5,45 v1(49,44.5)
  Bottom Layer w0.15: R44.8@47.475,45.4 48.375,44.5 v1(49,44.5)
LEDG44: D45.6 R45.8 | length 3.3
  Top Layer w0.15: D45.6@53.8,45 54.5,45 v1(55,44.5)
  Bottom Layer w0.15: R45.8@53.475,45.4 54.375,44.5 v1(55,44.5)
LEDG45: D46.6 R46.8 | length 3.3
  Top Layer w0.15: D46.6@5.8,53.2 6.5,53.2 v1(7,52.7)
  Bottom Layer w0.15: R46.8@5.475,53.6 6.375,52.7 v1(7,52.7)
LEDG46: D47.6 R47.8 | length 3.3
  Top Layer w0.15: D47.6@11.8,53.2 12.5,53.2 v1(13,52.7)
  Bottom Layer w0.15: R47.8@11.475,53.6 12.375,52.7 v1(13,52.7)
LEDG47: D48.6 R48.8 | length 3.3
  Top Layer w0.15: D48.6@17.8,53.2 18.5,53.2 v1(19,52.7)
  Bottom Layer w0.15: R48.8@17.475,53.6 18.375,52.7 v1(19,52.7)
LEDR0: D1.5 R1.6 | length 8.1
  Top Layer w0.15: v1(1.45,10.6) 3.85,10.6 4.2,10.95 D1.5@4.2,12.2
  Bottom Layer w0.15: v1(1.45,10.6) 1.45,11 2.05,11.6 3.65,11.6 3.8,11.75 R1.6@3.8,12.6
LEDR1: D2.5 R2.6 | length 8.1
  Top Layer w0.15: v1(7.45,10.6) 9.85,10.6 10.2,10.95 D2.5@10.2,12.2
  Bottom Layer w0.15: v1(7.45,10.6) 7.45,11 8.05,11.6 9.65,11.6 9.8,11.75 R2.6@9.8,12.6
LEDR2: D3.5 R3.6 | length 8.1
  Top Layer w0.15: v1(13.45,10.6) 15.85,10.6 16.2,10.95 D3.5@16.2,12.2
  Bottom Layer w0.15: v1(13.45,10.6) 13.45,11 14.05,11.6 15.65,11.6 15.8,11.75 R3.6@15.8,12.6
LEDR3: D4.5 R4.6 | length 8.1
  Top Layer w0.15: v1(19.45,10.6) 21.85,10.6 22.2,10.95 D4.5@22.2,12.2
  Bottom Layer w0.15: v1(19.45,10.6) 19.45,11 20.05,11.6 21.65,11.6 21.8,11.75 R4.6@21.8,12.6
LEDR4: D5.5 R5.6 | length 8.1
  Top Layer w0.15: v1(25.45,10.6) 27.85,10.6 28.2,10.95 D5.5@28.2,12.2
  Bottom Layer w0.15: v1(25.45,10.6) 25.45,11 26.05,11.6 27.65,11.6 27.8,11.75 R5.6@27.8,12.6
LEDR5: D6.5 R6.6 | length 8.1
  Top Layer w0.15: v1(31.45,10.6) 33.85,10.6 34.2,10.95 D6.5@34.2,12.2
  Bottom Layer w0.15: v1(31.45,10.6) 31.45,11 32.05,11.6 33.65,11.6 33.8,11.75 R6.6@33.8,12.6
LEDR6: D7.5 R7.6 | length 8.1
  Top Layer w0.15: v1(37.45,10.6) 39.85,10.6 40.2,10.95 D7.5@40.2,12.2
  Bottom Layer w0.15: v1(37.45,10.6) 37.45,11 38.05,11.6 39.65,11.6 39.8,11.75 R7.6@39.8,12.6
LEDR7: D8.5 R8.6 | length 8.1
  Top Layer w0.15: v1(43.45,10.6) 45.85,10.6 46.2,10.95 D8.5@46.2,12.2
  Bottom Layer w0.15: v1(43.45,10.6) 43.45,11 44.05,11.6 45.65,11.6 45.8,11.75 R8.6@45.8,12.6
LEDR8: D9.5 R9.6 | length 8.1
  Top Layer w0.15: v1(49.45,10.6) 51.85,10.6 52.2,10.95 D9.5@52.2,12.2
  Bottom Layer w0.15: v1(49.45,10.6) 49.45,11 50.05,11.6 51.65,11.6 51.8,11.75 R9.6@51.8,12.6
LEDR9: D10.5 R10.6 | length 8.1
  Top Layer w0.15: v1(1.45,18.8) 3.85,18.8 4.2,19.15 D10.5@4.2,20.4
  Bottom Layer w0.15: v1(1.45,18.8) 1.45,19.2 2.05,19.8 3.65,19.8 3.8,19.95 R10.6@3.8,20.8
LEDR10: D11.5 R11.6 | length 8.1
  Top Layer w0.15: v1(7.45,18.8) 9.85,18.8 10.2,19.15 D11.5@10.2,20.4
  Bottom Layer w0.15: v1(7.45,18.8) 7.45,19.2 8.05,19.8 9.65,19.8 9.8,19.95 R11.6@9.8,20.8
LEDR11: D12.5 R12.6 | length 8.1
  Top Layer w0.15: v1(13.45,18.8) 15.85,18.8 16.2,19.15 D12.5@16.2,20.4
  Bottom Layer w0.15: v1(13.45,18.8) 13.45,19.2 14.05,19.8 15.65,19.8 15.8,19.95 R12.6@15.8,20.8
LEDR12: D13.5 R13.6 | length 8.1
  Top Layer w0.15: v1(19.45,18.8) 21.85,18.8 22.2,19.15 D13.5@22.2,20.4
  Bottom Layer w0.15: v1(19.45,18.8) 19.45,19.2 20.05,19.8 21.65,19.8 21.8,19.95 R13.6@21.8,20.8
LEDR13: D14.5 R14.6 | length 8.1
  Top Layer w0.15: v1(25.45,18.8) 27.85,18.8 28.2,19.15 D14.5@28.2,20.4
  Bottom Layer w0.15: v1(25.45,18.8) 25.45,19.2 26.05,19.8 27.65,19.8 27.8,19.95 R14.6@27.8,20.8
LEDR14: D15.5 R15.6 | length 8.1
  Top Layer w0.15: v1(31.45,18.8) 33.85,18.8 34.2,19.15 D15.5@34.2,20.4
  Bottom Layer w0.15: v1(31.45,18.8) 31.45,19.2 32.05,19.8 33.65,19.8 33.8,19.95 R15.6@33.8,20.8
LEDR15: D16.5 R16.6 | length 8.1
  Top Layer w0.15: v1(37.45,18.8) 39.85,18.8 40.2,19.15 D16.5@40.2,20.4
  Bottom Layer w0.15: v1(37.45,18.8) 37.45,19.2 38.05,19.8 39.65,19.8 39.8,19.95 R16.6@39.8,20.8
LEDR16: D17.5 R17.6 | length 8.1
  Top Layer w0.15: v1(43.45,18.8) 45.85,18.8 46.2,19.15 D17.5@46.2,20.4
  Bottom Layer w0.15: v1(43.45,18.8) 43.45,19.2 44.05,19.8 45.65,19.8 45.8,19.95 R17.6@45.8,20.8
LEDR17: D18.5 R18.6 | length 8.1
  Top Layer w0.15: v1(49.45,18.8) 51.85,18.8 52.2,19.15 D18.5@52.2,20.4
  Bottom Layer w0.15: v1(49.45,18.8) 49.45,19.2 50.05,19.8 51.65,19.8 51.8,19.95 R18.6@51.8,20.8
LEDR18: D19.5 R19.6 | length 8.1
  Top Layer w0.15: v1(1.45,27) 3.85,27 4.2,27.35 D19.5@4.2,28.6
  Bottom Layer w0.15: v1(1.45,27) 1.45,27.4 2.05,28 3.65,28 3.8,28.15 R19.6@3.8,29
LEDR19: D20.5 R20.6 | length 8.1
  Top Layer w0.15: v1(7.45,27) 9.85,27 10.2,27.35 D20.5@10.2,28.6
  Bottom Layer w0.15: v1(7.45,27) 7.45,27.4 8.05,28 9.65,28 9.8,28.15 R20.6@9.8,29
LEDR20: D21.5 R21.6 | length 8.1
  Top Layer w0.15: v1(13.45,27) 15.85,27 16.2,27.35 D21.5@16.2,28.6
  Bottom Layer w0.15: v1(13.45,27) 13.45,27.4 14.05,28 15.65,28 15.8,28.15 R21.6@15.8,29
LEDR21: D22.5 R22.6 | length 8.1
  Top Layer w0.15: v1(19.45,27) 21.85,27 22.2,27.35 D22.5@22.2,28.6
  Bottom Layer w0.15: v1(19.45,27) 19.45,27.4 20.05,28 21.65,28 21.8,28.15 R22.6@21.8,29
LEDR22: D23.5 R23.6 | length 8.1
  Top Layer w0.15: v1(25.45,27) 27.85,27 28.2,27.35 D23.5@28.2,28.6
  Bottom Layer w0.15: v1(25.45,27) 25.45,27.4 26.05,28 27.65,28 27.8,28.15 R23.6@27.8,29
LEDR23: D24.5 R24.6 | length 8.1
  Top Layer w0.15: v1(31.45,27) 33.85,27 34.2,27.35 D24.5@34.2,28.6
  Bottom Layer w0.15: v1(31.45,27) 31.45,27.4 32.05,28 33.65,28 33.8,28.15 R24.6@33.8,29
LEDR24: D25.5 R25.6 | length 8.1
  Top Layer w0.15: v1(37.45,27) 39.85,27 40.2,27.35 D25.5@40.2,28.6
  Bottom Layer w0.15: v1(37.45,27) 37.45,27.4 38.05,28 39.65,28 39.8,28.15 R25.6@39.8,29
LEDR25: D26.5 R26.6 | length 8.1
  Top Layer w0.15: v1(43.45,27) 45.85,27 46.2,27.35 D26.5@46.2,28.6
  Bottom Layer w0.15: v1(43.45,27) 43.45,27.4 44.05,28 45.65,28 45.8,28.15 R26.6@45.8,29
LEDR26: D27.5 R27.6 | length 8.1
  Top Layer w0.15: v1(49.45,27) 51.85,27 52.2,27.35 D27.5@52.2,28.6
  Bottom Layer w0.15: v1(49.45,27) 49.45,27.4 50.05,28 51.65,28 51.8,28.15 R27.6@51.8,29
LEDR27: D28.5 R28.6 | length 8.1
  Top Layer w0.15: v1(1.45,35.2) 3.85,35.2 4.2,35.55 D28.5@4.2,36.8
  Bottom Layer w0.15: v1(1.45,35.2) 1.45,35.6 2.05,36.2 3.65,36.2 3.8,36.35 R28.6@3.8,37.2
LEDR28: D29.5 R29.6 | length 8.1
  Top Layer w0.15: v1(7.45,35.2) 9.85,35.2 10.2,35.55 D29.5@10.2,36.8
  Bottom Layer w0.15: v1(7.45,35.2) 7.45,35.6 8.05,36.2 9.65,36.2 9.8,36.35 R29.6@9.8,37.2
LEDR29: D30.5 R30.6 | length 8.1
  Top Layer w0.15: v1(13.45,35.2) 15.85,35.2 16.2,35.55 D30.5@16.2,36.8
  Bottom Layer w0.15: v1(13.45,35.2) 13.45,35.6 14.05,36.2 15.65,36.2 15.8,36.35 R30.6@15.8,37.2
LEDR30: D31.5 R31.6 | length 8.1
  Top Layer w0.15: v1(19.45,35.2) 21.85,35.2 22.2,35.55 D31.5@22.2,36.8
  Bottom Layer w0.15: v1(19.45,35.2) 19.45,35.6 20.05,36.2 21.65,36.2 21.8,36.35 R31.6@21.8,37.2
LEDR31: D32.5 R32.6 | length 8.1
  Top Layer w0.15: v1(25.45,35.2) 27.85,35.2 28.2,35.55 D32.5@28.2,36.8
  Bottom Layer w0.15: v1(25.45,35.2) 25.45,35.6 26.05,36.2 27.65,36.2 27.8,36.35 R32.6@27.8,37.2
LEDR32: D33.5 R33.6 | length 8.1
  Top Layer w0.15: v1(31.45,35.2) 33.85,35.2 34.2,35.55 D33.5@34.2,36.8
  Bottom Layer w0.15: v1(31.45,35.2) 31.45,35.6 32.05,36.2 33.65,36.2 33.8,36.35 R33.6@33.8,37.2
LEDR33: D34.5 R34.6 | length 8.1
  Top Layer w0.15: v1(37.45,35.2) 39.85,35.2 40.2,35.55 D34.5@40.2,36.8
  Bottom Layer w0.15: v1(37.45,35.2) 37.45,35.6 38.05,36.2 39.65,36.2 39.8,36.35 R34.6@39.8,37.2
LEDR34: D35.5 R35.6 | length 8.1
  Top Layer w0.15: v1(43.45,35.2) 45.85,35.2 46.2,35.55 D35.5@46.2,36.8
  Bottom Layer w0.15: v1(43.45,35.2) 43.45,35.6 44.05,36.2 45.65,36.2 45.8,36.35 R35.6@45.8,37.2
LEDR35: D36.5 R36.6 | length 8.1
  Top Layer w0.15: v1(49.45,35.2) 51.85,35.2 52.2,35.55 D36.5@52.2,36.8
  Bottom Layer w0.15: v1(49.45,35.2) 49.45,35.6 50.05,36.2 51.65,36.2 51.8,36.35 R36.6@51.8,37.2
LEDR36: D37.5 R37.6 | length 8.1
  Top Layer w0.15: v1(1.45,43.4) 3.85,43.4 4.2,43.75 D37.5@4.2,45
  Bottom Layer w0.15: v1(1.45,43.4) 1.45,43.8 2.05,44.4 3.65,44.4 3.8,44.55 R37.6@3.8,45.4
LEDR37: D38.5 R38.6 | length 8.1
  Top Layer w0.15: v1(7.45,43.4) 9.85,43.4 10.2,43.75 D38.5@10.2,45
  Bottom Layer w0.15: v1(7.45,43.4) 7.45,43.8 8.05,44.4 9.65,44.4 9.8,44.55 R38.6@9.8,45.4
LEDR38: D39.5 R39.6 | length 8.1
  Top Layer w0.15: v1(13.45,43.4) 15.85,43.4 16.2,43.75 D39.5@16.2,45
  Bottom Layer w0.15: v1(13.45,43.4) 13.45,43.8 14.05,44.4 15.65,44.4 15.8,44.55 R39.6@15.8,45.4
LEDR39: D40.5 R40.6 | length 8.1
  Top Layer w0.15: v1(19.45,43.4) 21.85,43.4 22.2,43.75 D40.5@22.2,45
  Bottom Layer w0.15: v1(19.45,43.4) 19.45,43.8 20.05,44.4 21.65,44.4 21.8,44.55 R40.6@21.8,45.4
LEDR40: D41.5 R41.6 | length 8.1
  Top Layer w0.15: v1(25.45,43.4) 27.85,43.4 28.2,43.75 D41.5@28.2,45
  Bottom Layer w0.15: v1(25.45,43.4) 25.45,43.8 26.05,44.4 27.65,44.4 27.8,44.55 R41.6@27.8,45.4
LEDR41: D42.5 R42.6 | length 8.1
  Top Layer w0.15: v1(31.45,43.4) 33.85,43.4 34.2,43.75 D42.5@34.2,45
  Bottom Layer w0.15: v1(31.45,43.4) 31.45,43.8 32.05,44.4 33.65,44.4 33.8,44.55 R42.6@33.8,45.4
LEDR42: D43.5 R43.6 | length 8.1
  Top Layer w0.15: v1(37.45,43.4) 39.85,43.4 40.2,43.75 D43.5@40.2,45
  Bottom Layer w0.15: v1(37.45,43.4) 37.45,43.8 38.05,44.4 39.65,44.4 39.8,44.55 R43.6@39.8,45.4
LEDR43: D44.5 R44.6 | length 8.1
  Top Layer w0.15: v1(43.45,43.4) 45.85,43.4 46.2,43.75 D44.5@46.2,45
  Bottom Layer w0.15: v1(43.45,43.4) 43.45,43.8 44.05,44.4 45.65,44.4 45.8,44.55 R44.6@45.8,45.4
LEDR44: D45.5 R45.6 | length 8.1
  Top Layer w0.15: v1(49.45,43.4) 51.85,43.4 52.2,43.75 D45.5@52.2,45
  Bottom Layer w0.15: v1(49.45,43.4) 49.45,43.8 50.05,44.4 51.65,44.4 51.8,44.55 R45.6@51.8,45.4
LEDR45: D46.5 R46.6 | length 8.1
  Top Layer w0.15: v1(1.45,51.6) 3.85,51.6 4.2,51.95 D46.5@4.2,53.2
  Bottom Layer w0.15: v1(1.45,51.6) 1.45,52 2.05,52.6 3.65,52.6 3.8,52.75 R46.6@3.8,53.6
LEDR46: D47.5 R47.6 | length 8.1
  Top Layer w0.15: v1(7.45,51.6) 9.85,51.6 10.2,51.95 D47.5@10.2,53.2
  Bottom Layer w0.15: v1(7.45,51.6) 7.45,52 8.05,52.6 9.65,52.6 9.8,52.75 R47.6@9.8,53.6
LEDR47: D48.5 R48.6 | length 8.1
  Top Layer w0.15: v1(13.45,51.6) 15.85,51.6 16.2,51.95 D48.5@16.2,53.2
  Bottom Layer w0.15: v1(13.45,51.6) 13.45,52 14.05,52.6 15.65,52.6 15.8,52.75 R48.6@15.8,53.6
NetT2_3: T2.3 T2.8 | length 0.9
  Bottom Layer w0.15: T2.3@4.85,6.95 4.85,7.638 T2.8@5.012,7.8
NetT4_3: T4.3 T4.8 | length 0.9
  Bottom Layer w0.15: T4.3@10.85,6.95 10.85,7.637 T4.8@11.012,7.8
NetT6_3: T6.3 T6.8 | length 0.9
  Bottom Layer w0.15: T6.3@16.85,6.95 16.85,7.637 T6.8@17.012,7.8
NetT8_3: T8.3 T8.8 | length 0.9
  Bottom Layer w0.15: T8.3@22.85,6.95 22.85,7.637 T8.8@23.012,7.8
NetT10_3: T10.3 T10.8 | length 0.9
  Bottom Layer w0.15: T10.3@28.85,6.95 28.85,7.637 T10.8@29.012,7.8
NetT12_3: T12.3 T12.8 | length 0.9
  Bottom Layer w0.15: T12.3@34.85,6.95 34.85,7.637 T12.8@35.012,7.8
NetT14_3: T14.3 T14.8 | length 0.9
  Bottom Layer w0.15: T14.3@40.85,6.95 40.85,7.637 T14.8@41.012,7.8
NetT16_3: T16.3 T16.8 | length 0.9
  Bottom Layer w0.15: T16.3@46.85,6.95 46.85,7.637 T16.8@47.012,7.8
NetT18_3: T18.3 T18.8 | length 0.9
  Bottom Layer w0.15: T18.3@52.85,6.95 52.85,7.637 T18.8@53.012,7.8
NetT20_3: T20.3 T20.8 | length 0.9
  Bottom Layer w0.15: T20.3@4.85,15.15 4.85,15.837 T20.8@5.012,16
NetT22_3: T22.3 T22.8 | length 0.9
  Bottom Layer w0.15: T22.3@10.85,15.15 10.85,15.837 T22.8@11.013,16